# EAGLE board Main LF (EAGLE 7.5.0)
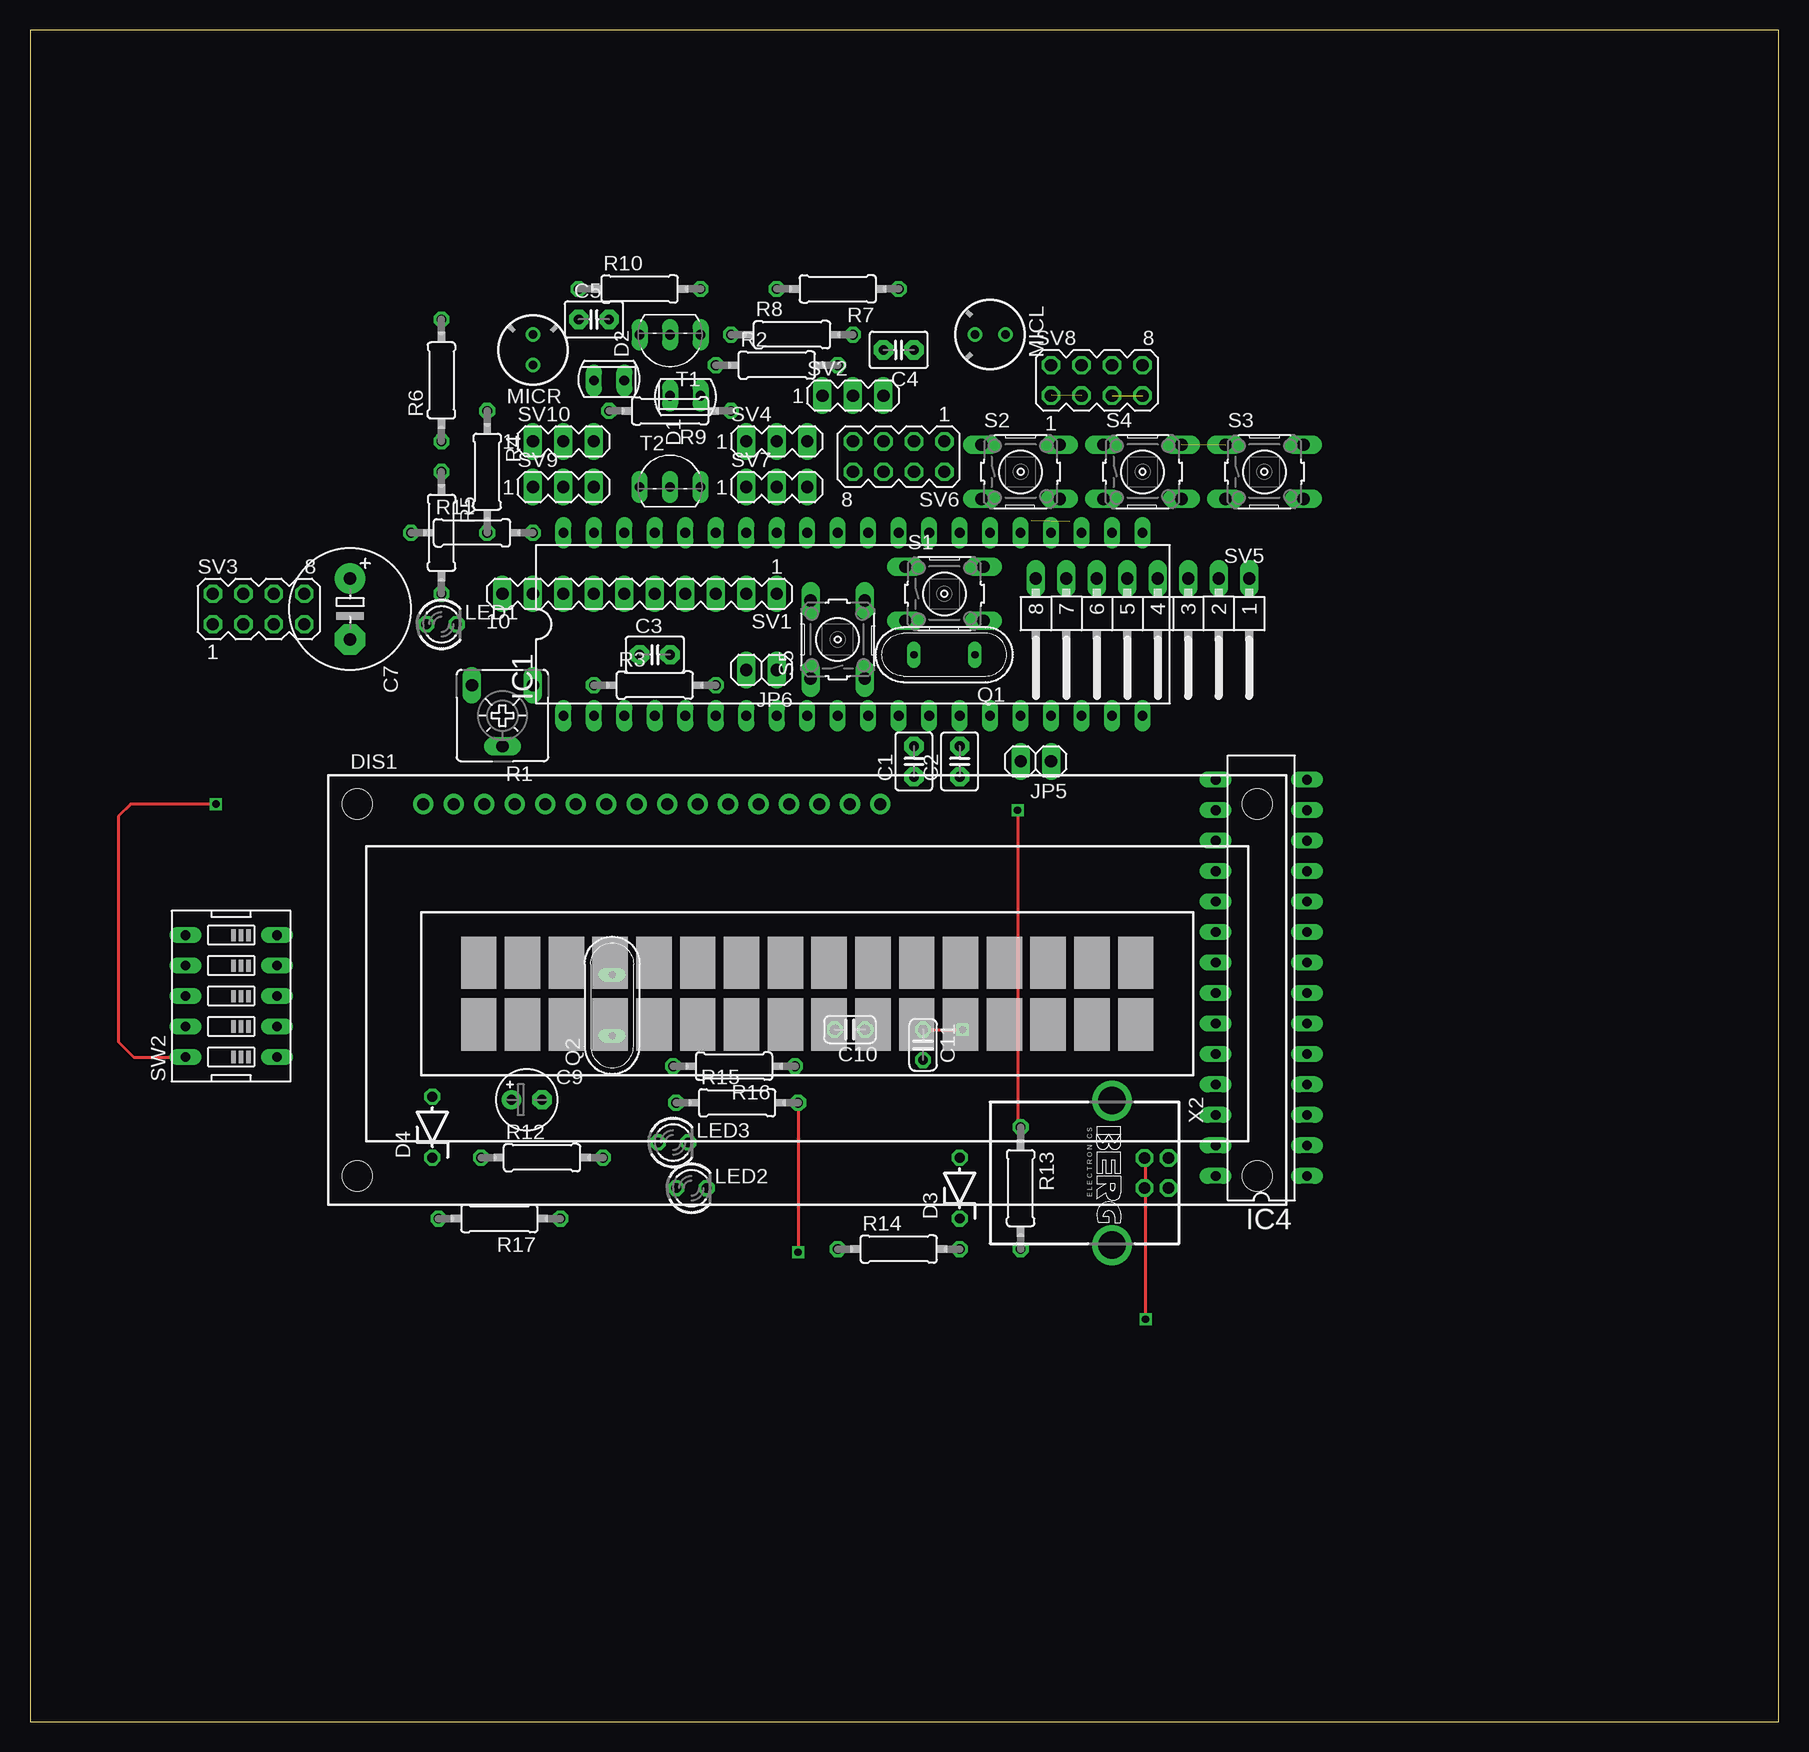
[diagram p0: board, top side]
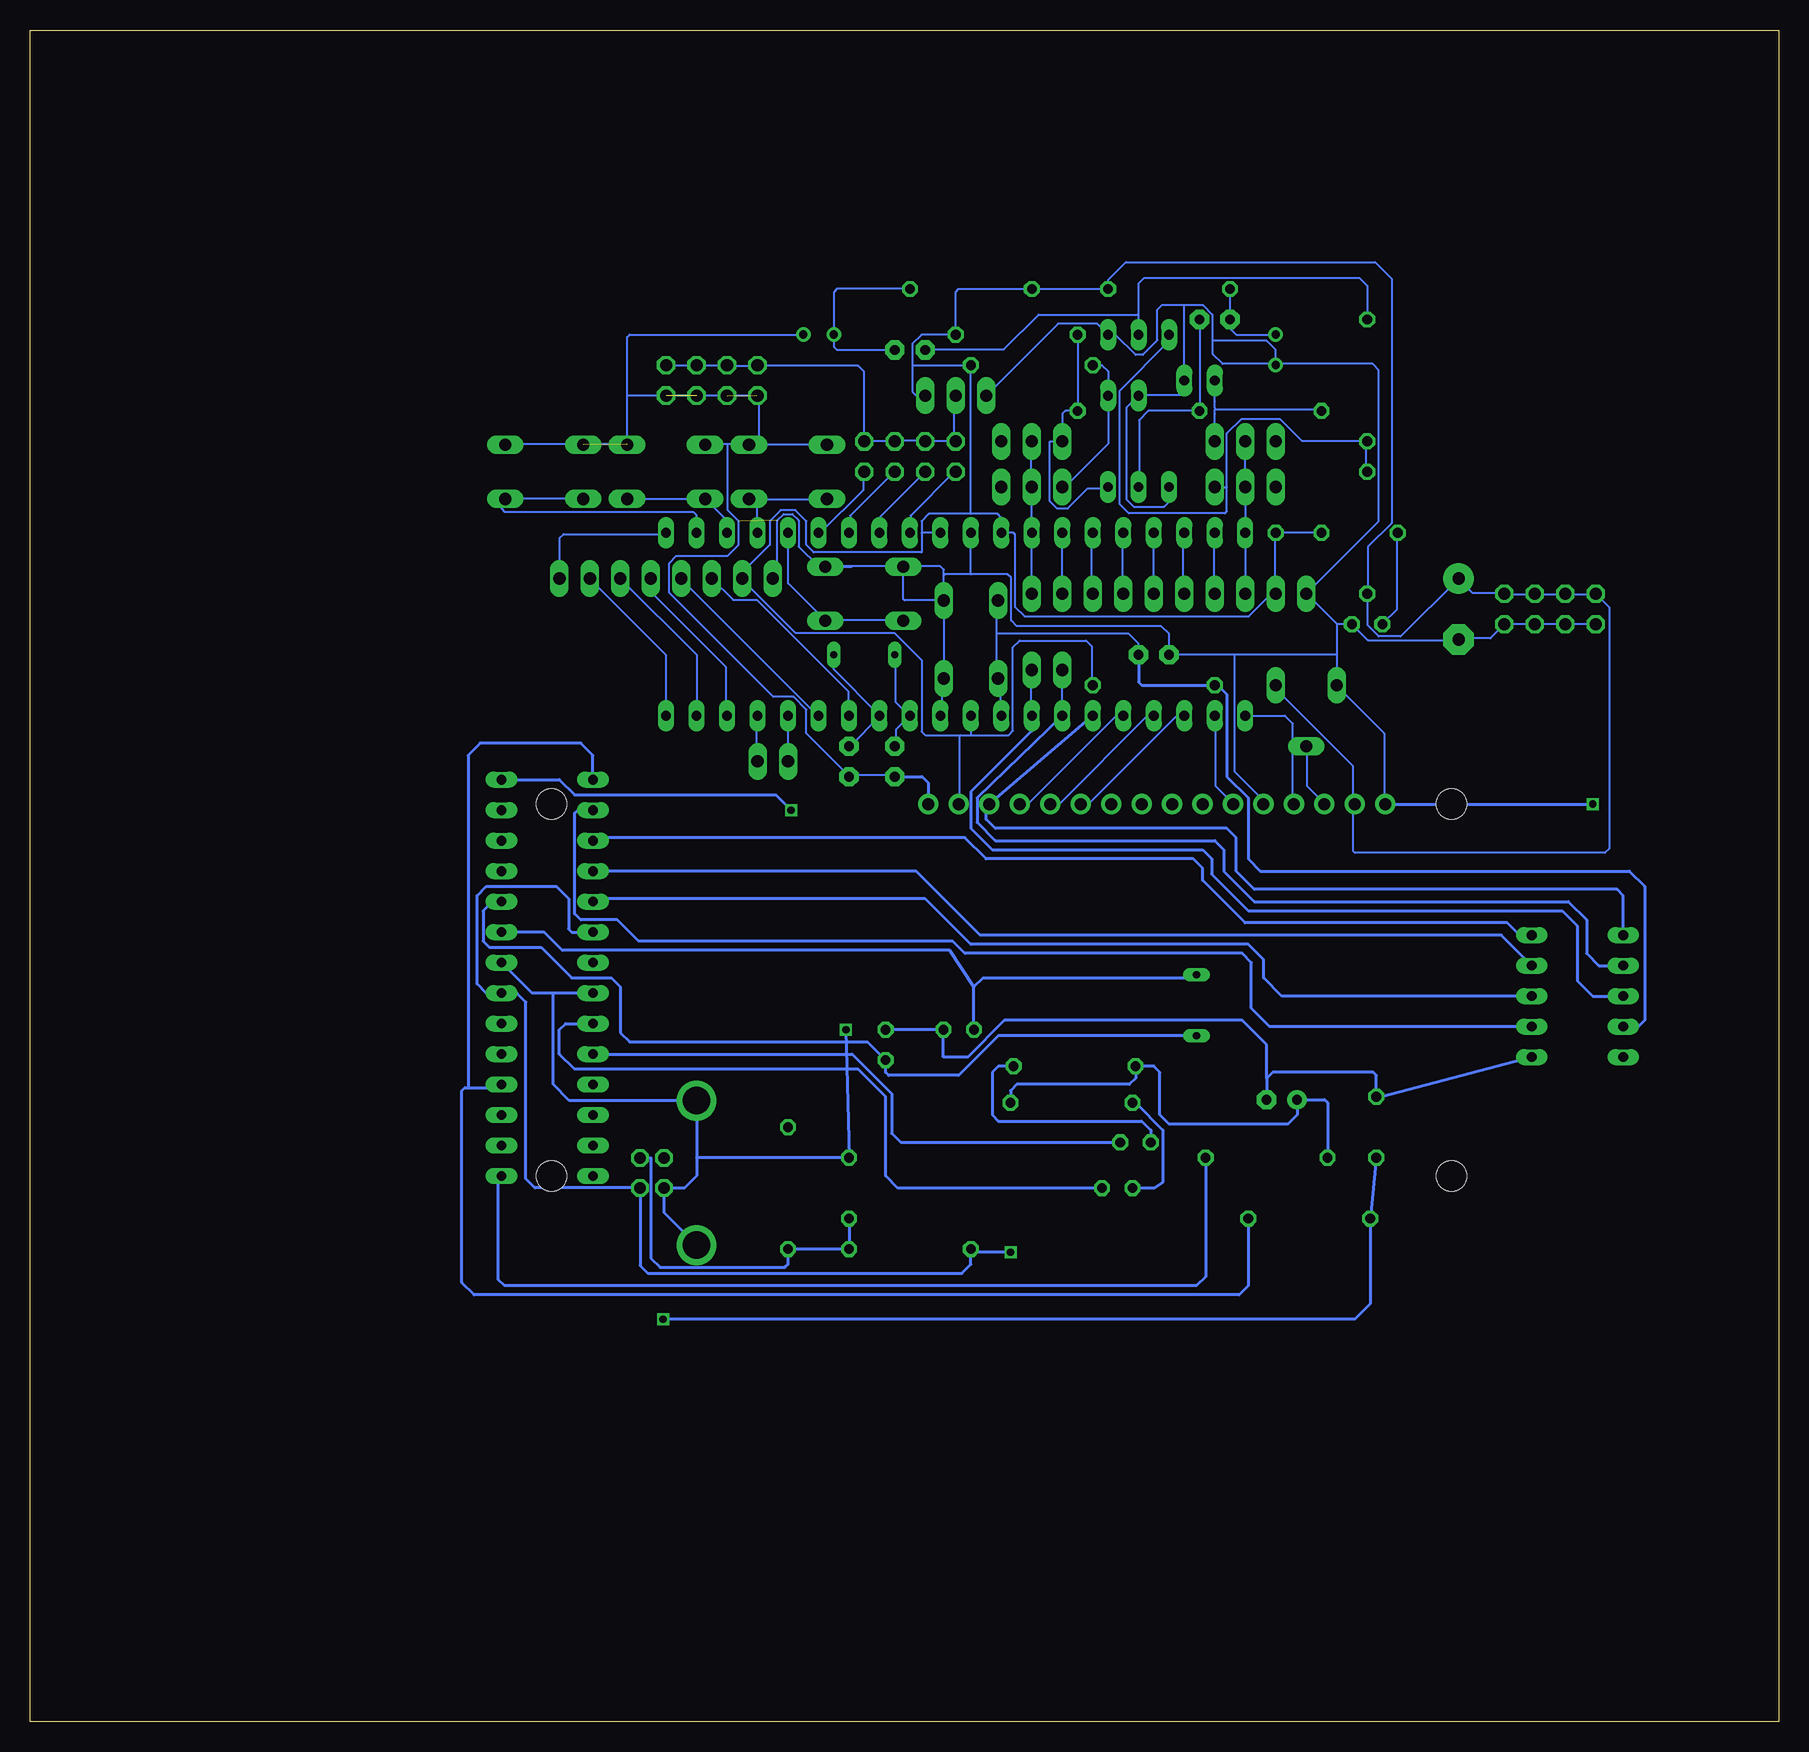
[diagram p1: board, bottom side, seen from below]

Size 145.72 x 140.96 mm. Coordinates in mm from the lower left corner, seen from the top.
Outline: 0,0 145.72,0 145.72,140.96 0,140.96 0,0
Copper layers (1*16): Top 0.035mm / dielectric 1.5mm / Bottom 0.035mm
Design rules "default": minimum track width 6mil, minimum drill 0.35mm, track to track 6mil, track to pad 6mil, pad to pad 6mil, via to via 6mil, smd to smd 6mil, copper to edge 40mil, drill to drill 6mil, minimum pad ring 10mil, minimum via ring 8mil, stop-mask expansion 4mil, vias tented up to drill 0mil, thermal gap 10mil

## Footprints (pad centres in the part's own frame; a part is rotated, then mirrored left to right if it is on the bottom)
C2.5-3 = drill 0.813 pad 1.6 octagon: 1 -1.27,0; 2 1.27,0
E5-10,5 = drill 1.016 pad 2.54: + -2.54,0 | drill 1.016 pad 2.54 octagon: - 2.54,0
E2,5-5 = drill 0.813 pad 1.6: + -1.27,0 | drill 0.813 pad 1.6 octagon: - 1.27,0
C025-024X044 = drill 0.813 octagon: 1 -1.27,0; 2 1.27,0
SFH225 = drill 0.813 long: A 0,1.27; K 0,-1.27
ZDIO-5 = drill 0.813 octagon: A 2.54,0; C -2.54,0
TUXGR_16X2_R2 = drill 1 pad 1.676: 1 -32,15.5; 2 -29.46,15.5; 3 -26.92,15.5; 4 -24.38,15.5; 5 -21.84,15.5; 6 -19.3,15.5; 7 -16.76,15.5; 8 -14.22,15.5; 9 -11.68,15.5; 10 -9.14,15.5; 11 -6.6,15.5; 12 -4.06,15.5; 13 -1.52,15.5; 14 1.02,15.5; 15 3.56,15.5; 16 6.1,15.5 | hole 2.5: -37.5,-15.5; 37.5,-15.5; -37.5,15.5; 37.5,15.5
DIL40 = drill 0.813 long: 1 -24.13,-7.62; 2 -21.59,-7.62; 3 -19.05,-7.62; 4 -16.51,-7.62; 5 -13.97,-7.62; 6 -11.43,-7.62; 7 -8.89,-7.62; 8 -6.35,-7.62; 9 -3.81,-7.62; 10 -1.27,-7.62; 11 1.27,-7.62; 12 3.81,-7.62; 13 6.35,-7.62; 14 8.89,-7.62; 15 11.43,-7.62; 16 13.97,-7.62; 17 16.51,-7.62; 18 19.05,-7.62; 19 21.59,-7.62; 20 24.13,-7.62; 21 24.13,7.62; 22 21.59,7.62; 23 19.05,7.62; 24 16.51,7.62; 25 13.97,7.62; 26 11.43,7.62; 27 8.89,7.62; 28 6.35,7.62; 29 3.81,7.62; 30 1.27,7.62; 31 -1.27,7.62; 32 -3.81,7.62; 33 -6.35,7.62; 34 -8.89,7.62; 35 -11.43,7.62; 36 -13.97,7.62; 37 -16.51,7.62; 38 -19.05,7.62; 39 -21.59,7.62; 40 -24.13,7.62
DIL28-3 = drill 0.813 long: 1 -16.51,-3.81; 2 -13.97,-3.81; 3 -11.43,-3.81; 4 -8.89,-3.81; 5 -6.35,-3.81; 6 -3.81,-3.81; 7 -1.27,-3.81; 8 1.27,-3.81; 9 3.81,-3.81; 10 6.35,-3.81; 11 8.89,-3.81; 12 11.43,-3.81; 13 13.97,-3.81; 14 16.51,-3.81; 15 16.51,3.81; 16 13.97,3.81; 17 11.43,3.81; 18 8.89,3.81; 19 6.35,3.81; 20 3.81,3.81; 21 1.27,3.81; 22 -1.27,3.81; 23 -3.81,3.81; 24 -6.35,3.81; 25 -8.89,3.81; 26 -11.43,3.81; 27 -13.97,3.81; 28 -16.51,3.81
1X02 = drill 1.016 long: 1 -1.27,0; 2 1.27,0
LED3MM = drill 0.813 octagon: A -1.27,0; K 1.27,0
F6050AP = drill 0.7 pad 1.2: 1 0,1.27; 2 0,-1.27
QS = drill 0.61 long: 1 -2.54,0; 2 2.54,0
CA6V = drill 1.016 long: A -2.54,-2.54; E 2.54,-2.54; S 0,2.54
0207/10 = drill 0.813 octagon: 1 -5.08,0; 2 5.08,0
B3F-10XX = drill 1.016 long: 1 -3.251,2.261; 2 3.251,2.261; 3 -3.251,-2.261; 4 3.251,-2.261
MA10-1 = drill 1.016 long: 1 -11.43,0; 2 -8.89,0; 3 -6.35,0; 4 -3.81,0; 5 -1.27,0; 6 1.27,0; 7 3.81,0; 8 6.35,0; 9 8.89,0; 10 11.43,0
MA03-1 = drill 1.016 long: 1 -2.54,0; 2 0,0; 3 2.54,0
MA04-2 = drill 1.016 octagon: 1 -3.81,-1.27; 2 -3.81,1.27; 3 -1.27,-1.27; 4 -1.27,1.27; 5 1.27,-1.27; 6 1.27,1.27; 7 3.81,-1.27; 8 3.81,1.27
MA08-1W = drill 1.016 long: 1 -8.89,0; 2 -6.35,0; 3 -3.81,0; 4 -1.27,0; 5 1.27,0; 6 3.81,0; 7 6.35,0; 8 8.89,0
EDG-05 = drill 0.813 long: 1 -5.08,-3.81; 2 -2.54,-3.81; 3 0,-3.81; 4 2.54,-3.81; 5 5.08,-3.81; 6 5.08,3.81; 7 2.54,3.81; 8 0,3.81; 9 -2.54,3.81; 10 -5.08,3.81
TO92-EBC = drill 0.813 long: B 0,-1.27; C 2.54,-1.27; E -2.54,-1.27
PN61729-S = drill 0.95 octagon: 1 1.25,4.71; 2 -1.25,4.71; 3 -1.25,2.71; 4 1.25,2.71 | drill 2.3 pad 2.9: S1 -6.02,0; S2 6.02,0

## Placement (x,y rotation side)
C1  22p  [C2.5-3]  73.66,80.01 90 top
C2  22p  [C2.5-3]  77.47,80.01 90 top
C3  10nF  [C2.5-3]  52.07,88.9 0 top
C4  100nF  [C2.5-3]  72.39,114.3 180 top
C5  100nF  [C2.5-3]  46.99,116.84 0 top
C7  1000uF/16V  [E5-10,5]  26.67,92.71 270 top
C9  10uF/16V  [E2,5-5]  41.4,51.82 0 top
C10  22pF  [C025-024X044]  68.33,57.66 180 top
C11  22pF  [C025-024X044]  74.42,56.39 270 top
D1  SFH225  [SFH225]  54.61,110.49 270 top
D2  SFH225  [SFH225]  48.26,111.76 90 top
D3  DZ3,6V  [ZDIO-5]  77.47,44.45 90 top
D4  DZ3,6V  [ZDIO-5]  33.53,49.53 90 top
DIS1  TUXGR_16X2_R2  [TUXGR_16X2_R2]  64.77,60.96 0 top
IC1  MEGA16-P  [DIL40]  68.58,91.44 0 top
IC4  MEGA8-P  [DIL28-3]  102.62,61.98 90 top
JP5  [1X02]  83.82,80.01 180 top
JP6  [1X02]  60.96,87.63 180 top
LED1  merah  [LED3MM]  34.29,91.44 0 top
LED2  Merah  [LED3MM]  55.12,44.45 0 top
LED3  hijau  [LED3MM]  53.59,48.26 0 top
MICL  MC  [F6050AP]  80.01,115.57 270 top
MICR  MC  [F6050AP]  41.91,114.3 180 top
Q1  8MHz  [QS]  76.2,88.9 180 top
Q2  12MHz  [QS]  48.51,59.69 90 top
R1  20K  [CA6V]  39.37,83.82 180 top
R2  56K  [0207/10]  62.23,113.03 0 top
R3  10K  [0207/10]  52.07,86.36 0 top
R4  56K  [0207/10]  38.1,104.14 270 top
R5  10K  [0207/10]  34.29,99.06 270 top
R6  100K  [0207/10]  34.29,111.76 90 top
R7  10K  [0207/10]  67.31,119.38 180 top
R8  10K  [0207/10]  63.5,115.57 0 top
R9  100K  [0207/10]  53.34,109.22 180 top
R10  10K  [0207/10]  50.8,119.38 0 top
R11  330  [0207/10]  36.83,99.06 0 top
R12  10K  [0207/10]  42.67,46.99 0 top
R13  68  [0207/10]  82.55,44.45 270 top
R14  2K2  [0207/10]  72.39,39.37 0 top
R15  330  [0207/10]  58.93,51.56 0 top
R16  330  [0207/10]  58.67,54.61 180 top
R17  68  [0207/10]  39.12,41.91 180 top
S1  [B3F-10XX]  76.2,93.98 0 top
S2  [B3F-10XX]  82.55,104.14 0 top
S3  [B3F-10XX]  102.87,104.14 0 top
S4  [B3F-10XX]  92.71,104.14 0 top
S5  [B3F-10XX]  67.31,90.17 90 top
SV1  [MA10-1]  50.8,93.98 180 top
SV2  [MA03-1]  68.58,110.49 0 top
SV3  [MA04-2]  19.05,92.71 0 top
SV4  [MA03-1]  62.23,106.68 0 top
SV5  [MA08-1W]  92.71,95.25 180 top
SV6  [MA04-2]  72.39,105.41 180 top
SV7  [MA03-1]  62.23,102.87 0 top
SV8  [MA04-2]  88.9,111.76 0 top
SV9  [MA03-1]  44.45,102.87 0 top
SV10  [MA03-1]  44.45,106.68 0 top
SW2  [EDG-05]  16.76,60.45 90 top
T1  [TO92-EBC]  53.34,114.3 180 top
T2  [TO92-EBC]  53.34,104.14 0 top
X2  PN61729-S  [PN61729-S]  90.17,45.72 270 top

## Library data of the parts
C1-C5 = capacitor-wima
C7 C9-C11 R2-R11 = rcl
D1 D2 = opto-trans-siemens; OC_FARNELL: unknown; OC_NEWARK: unknown
D3 D4 = diode
DIS1 = display-lcd; OC_FARNELL: unknown; OC_NEWARK: unknown
IC1 = atmel; MPN: ATMEGA16-16PU; OC_FARNELL: 9171142; OC_NEWARK: 01M6885
IC4 = atmel
JP5 JP6 = pinhead
LED1-LED3 = led
MICL MICR = microphon
Q1 Q2 SW2 = special
R1 = pot
R12-R17 = resistor
S1-S5 = switch-omron; MPN: B3F-1000; OC_FARNELL: 176432; OC_NEWARK: 36M3542
SV1-SV10 = con-lstb; OC_FARNELL: unknown; OC_NEWARK: unknown
T1 T2 = transistor
X2 = con-berg

## Nets
DGND: C9.- C10.1 C11.1 D3.A D4.A IC4.8 IC4.22 SW2.1 X2.4 X2.S1 X2.S2
GND: C1.1 C2.1 C3.1 C7.- D1.K D2.K DIS1.1 DIS1.5 DIS1.16 IC1.11 IC1.31 LED1.K MICL.1 MICR.1 R1.E S1.1 S1.2 S2.1 S2.2 S3.1 S3.2 S4.1 S4.2 S5.3 S5.4 SV1.10 SV2.1 SV3.1 SV3.3 SV3.5 SV3.7 SV5.8 SV8.1 SV8.3 SV8.5 SV8.7 SW2.10 T1.E T2.E
MISO: IC1.7 JP6.2 SW2.7
MOSI: DIS1.14 IC1.6 SW2.6
N$1: IC1.33 SV1.1 SV4.2 SV7.2
N$2: IC1.34 SV1.2
N$3: IC1.35 SV1.3
N$4: IC1.36 SV1.4
N$5: IC1.37 SV1.5
N$6: IC1.38 SV1.6
N$7: IC1.39 SV1.7
N$8: D2.A R4.1 SV10.3
N$9: IC1.24 S2.3 S2.4
N$10: DIS1.13 IC1.5
N$11: DIS1.12 IC1.4
N$12: DIS1.11 IC1.3
N$13: DIS1.6 IC1.2
N$14: R5.1 R6.1 SV9.3 T1.C
N$15: DIS1.3 R1.S
N$16: C1.2 IC1.12 Q1.2
N$17: C2.2 IC1.13 Q1.1
N$18: DIS1.4 IC1.1
N$19: D1.A R2.1 SV7.1
N$20: IC1.23 S4.3 S4.4
N$21: IC1.40 SV1.8 SV9.2 SV10.2
N$22: C4.2 R6.2 T1.B
N$23: C4.1 MICL.2 R7.1
N$24: R8.1 R9.1 SV4.1 T2.C
N$25: C5.2 R9.2 T2.B
N$26: C5.1 MICR.2 R10.1
N$27: IC1.22 S3.3 S3.4
N$28: IC1.25 S1.3 S1.4
N$30: IC1.21 SV5.1
N$32: IC1.20 SV5.2
N$33: IC1.19 SV5.3
N$34: IC1.18 SV5.4
N$35: IC1.15 SV5.5
N$36: IC1.14 SV5.6
N$37: IC1.16 JP5.2
N$38: IC1.17 JP5.1
N$41: LED1.A R11.1
N$42: IC4.1 R12.2
N$44: IC1.26 SV6.2
N$45: IC1.27 SV6.4
N$46: IC1.28 SV6.6
N$47: IC1.29 SV6.8
N$51: C10.2 IC4.9 Q2.2
N$52: C11.2 IC4.10 Q2.1
N$53: IC4.14 R13.1
N$55: LED2.A R15.1
N$56: LED3.A R16.1
N$57: IC4.23 LED2.K
N$58: IC4.24 LED3.K
N$59: D4.C R17.2 X2.3
N$67: IC4.4 IC4.15 R17.1
N$69: D3.C R13.2 R14.2 X2.2
N$175: IC4.17 SW2.5
N$176: IC4.18 SW2.4
N$177: IC4.19 SW2.3
N$178: IC4.16 SW2.2
RESET: C3.2 IC1.9 R3.1 S5.1 S5.2 SW2.9
SCK: IC1.8 JP6.1 SW2.8
VCC: C7.+ DIS1.2 DIS1.15 IC1.10 IC1.30 IC1.32 R1.A R2.2 R3.2 R4.2 R5.2 R7.2 R8.2 R10.2 R11.2 SV1.9 SV2.3 SV3.2 SV3.4 SV3.6 SV3.8 SV5.7
VDD: SV2.2 SV6.1 SV6.3 SV6.5 SV6.7 SV8.2 SV8.4 SV8.6 SV8.8
VPP: C9.+ IC4.7 IC4.20 R12.1 R14.1 R15.2 R16.2 X2.1

## Tracks (layer width: path | path; a pad name or v marks a point on that pad's centre or on a via)
DGND  (via drill 0.6)
  Top 0.254: C11.1 v77.72,57.66
  Bottom 0.254: X2.S2 92.88,42.41 X2.4 92.86,44.45 91.19,44.45 90.17,45.47 90.17,46.99 | SW2.1 33.02,52.07 D4.A 33.53,53.85 33.78,54.1 42.16,54.1 42.67,53.59 | 90.17,46.99 X2.S1 100.76,51.74 102.11,53.09 102.11,60.71 | 42.67,53.59 C9.- | IC4.22 102.11,60.71 | 102.11,60.71 103.89,60.71 IC4.8 | 90.17,46.99 D3.A v77.72,57.66 | C11.1 C10.1 69.6,55.37 67.56,55.37 64.52,58.42 44.7,58.42 42.67,56.39 42.67,53.59
GND  (via drill 0.6)  (5 unrouted)
  Top 0.254: v15.49,76.45 8.38,76.45 7.37,75.44 7.37,56.64 8.64,55.37 SW2.10
  Bottom 0.152: T2.E 50.8,101.65 51.21,101.24 53.75,101.24 54.36,101.85 54.36,109.47 D1.K 53.29,110.54 49.83,110.54 49.53,110.85 D2.K 49.53,118.01 | 47.19,115.06 47.19,117.25 47.95,118.01 49.53,118.01 | 47.19,115.06 47.19,114 46.33,113.13 33.83,113.13 33.33,112.62 33.33,100.03 SV1.10 39.27,93.93 36.83,91.49 | 49.53,118.01 51.41,118.01 51.77,117.65 51.77,115.11 52.98,113.89 53.59,113.89 55.27,115.57 T1.E 56.79,116.48 60.05,116.48 SV2.1 | 69.6,86.92 69.75,86.77 69.75,83.87 IC1.11 | 67.31,95.61 IC1.31 | 69.6,86.92 S5.3 | 17.78,91.49 15.34,91.49 SV3.1 | 17.78,91.49 20.22,91.49 SV3.5 20.37,91.49 22.81,91.49 SV3.7 24.03,90.27 26.62,90.27 C7.- 26.77,90.12 34.24,90.12 LED1.K 35.61,91.49 36.83,91.49 | 17.78,91.49 SV3.3 | 36.83,91.49 36.83,88.9 | 36.83,88.9 R1.E 36.83,86.31 32.87,82.35 32.87,76.56 DIS1.1 | 36.83,88.9 45.36,88.9 | 45.36,88.9 C3.1 50.8,90.63 51.46,91.29 63.47,91.29 63.96,91.77 63.96,95.3 64.26,95.61 67.31,95.61 | 45.36,88.9 45.36,79.2 43.08,76.91 43.08,76.56 DIS1.5 | 95.99,106.43 106.02,106.43 S3.2 | 84.99,106.43 85.75,106.43 S2.2 | 84.99,106.43 79.35,106.43 S2.1 | 87.58,106.43 85.9,106.43 S2.2 | 87.58,106.43 89.41,106.43 S4.1 | 85.14,110.54 SV8.1 | 84.99,106.43 84.99,110.39 SV8.1 | 84.99,106.43 S2.2 | C1.1 73.71,78.84 77.37,78.84 C2.1 77.52,78.84 81.03,82.35 81.03,84.33 82.09,85.39 83.77,85.39 92.46,94.08 92.46,96.52 91.85,97.13 87.58,97.13 86.66,98.04 86.66,100.03 87.58,100.94 87.58,106.43 | MICL.1 95.76,115.57 95.96,115.37 95.96,110.49 | S4.2 95.96,110.49 | 95.96,110.49 SV8.7 SV8.1 | MICR.1 41.91,114.3 42.67,115.06 47.19,115.06 | 72.97,96.27 S1.1 72.95,93.52 72.85,93.42 S5.4
  Bottom 0.152: 77.22,96.27 69.85,96.27 69.57,95.99 69.57,95.5 | 77.22,96.27 80.01,96.27 81.66,97.92 81.66,100.09 82.18,100.61 82.92,100.61 83.44,100.09 83.44,95.63 SV5.8 | S5.4 69.57,86.94 69.6,86.92 | S5.4 69.57,95.5 | 67.31,95.61 69.47,95.61 69.57,95.5 | S1.2 77.24,96.24 77.22,96.27
  Bottom 0.254: C1.1 71.37,78.74 70.87,78.23 DIS1.16 | DIS1.1 v15.5,76.46 v15.49,76.45
MISO
  Bottom 0.152: IC1.7 JP6.2
  Bottom 0.254: IC1.7 66.8,76.96 66.8,74.93 65.28,73.41 46.99,73.41 46.23,72.64 46.23,70.87 43.69,68.33 17.53,68.33 16,66.8 16,64.01 14.99,62.99 SW2.7
MOSI
  Bottom 0.254: IC1.6 DIS1.14 66.04,76.21 66.04,75.18 65.28,74.42 45.97,74.42 45.21,73.66 45.21,70.87 43.69,69.34 13.46,69.34 12.95,68.83 SW2.6
N$1
  Bottom 0.152: SV1.1 62.28,94.08 62.28,98.96 IC1.33 62.28,99.11 62.28,102.77 SV7.2 62.28,102.92 62.28,106.58 SV4.2
N$2
  Bottom 0.152: SV1.2 IC1.34
N$3
  Bottom 0.152: IC1.35 57.25,98.96 57.25,94.08 SV1.3
N$4
  Bottom 0.152: IC1.36 54.66,98.96 54.66,94.08 SV1.4
N$5
  Bottom 0.152: SV1.5 IC1.37
N$6
  Bottom 0.152: IC1.38 49.63,98.96 49.63,94.08 SV1.6
N$7
  Bottom 0.152: IC1.39 47.04,98.96 47.04,94.08 SV1.7
N$8
  Bottom 0.152: R4.1 38.2,109.32 46.99,109.32 | 46.89,111.76 D2.A 46.99,109.98 46.99,109.47 46.99,109.32 | SV10.3 46.99,108.97 46.99,109.32
N$9
  Bottom 0.152: 85.14,101.24 85.14,99.11 IC1.24 | 85.14,101.24 85.75,101.85 S2.4 85.14,101.24 | 85.14,101.24 84.53,101.85 79.35,101.85 S2.3
N$10
  Bottom 0.152: IC1.5 54.66,83.72 55.27,83.72 62.43,76.56 63.19,76.56 DIS1.13
N$11
  Bottom 0.152: IC1.4 52.07,83.72 52.68,83.72 59.84,76.56 60.6,76.56 DIS1.12
N$12
  Bottom 0.152: IC1.3 49.63,83.72 50.24,83.72 57.4,76.56 58.17,76.56 DIS1.11
N$13
  Bottom 0.152: IC1.2 46.89,83.72 46.89,77.93 45.52,76.56 DIS1.6
N$14
  Bottom 0.152: R5.1 34.39,104.14 34.39,106.58 R6.1 34.39,106.73 39.73,106.73 41.55,108.56 44.75,108.56 45.97,107.34 45.97,102.87 | T1.C 50.85,115.57 50.85,114.96 54.92,110.9 54.92,101.45 54.15,100.69 46.13,100.69 45.97,100.84 45.97,102.87 | SV9.3 45.97,102.87
N$15
  Bottom 0.152: R1.S 39.27,81.28 39.27,77.93 37.9,76.56 DIS1.3
N$16
  Bottom 0.152: Q1.2 73.56,88.9 73.56,84.94 72.49,83.87 IC1.12 73.56,82.65 73.56,81.28 C1.2
N$17
  Bottom 0.152: Q1.1 78.74,87.68 74.93,83.87 IC1.13 74.93,83.72 77.37,81.28 C2.2
N$18
  Bottom 0.152: IC1.1 41.15,83.82 40.49,83.16 40.49,76.56 DIS1.4
N$19
  Bottom 0.152: R2.1 56.39,113.03 55.88,112.52 D1.A 55.88,106.48 59.49,102.87 SV7.1
N$20
  Bottom 0.152: IC1.23 87.73,99.11 87.73,100.18 89.41,101.85 S4.3 89.56,101.85 95.96,101.85 S4.4
N$21
  Bottom 0.152: SV1.8 IC1.40 SV9.2 SV10.2
N$22
  Bottom 0.152: C4.2 71.12,114.35 64.57,114.35 61.67,117.25 53.44,117.25 53.34,117.35 | T1.B 53.34,117.35 | 53.34,117.35 53.34,119.84 52.88,120.29 34.95,120.29 34.29,119.63 R6.2
N$23
  Bottom 0.152: R7.1 78.49,119.38 78.74,119.13 MICL.2 78.74,114.55 78.49,114.3 C4.1
N$24
  Bottom 0.152: T2.C 55.88,102.77 57.56,102.77 59.23,101.09 60.15,101.09 60.76,101.7 60.76,106.63 60.71,106.68 SV4.1 59.69,108.97 59.44,109.22 R9.1 R8.1
N$25
  Bottom 0.152: C5.2 R9.2 52.53,109.22 53.29,108.46 53.29,102.92 T2.B
N$26
  Bottom 0.152: MICR.2 45.21,115.57 45.72,116.08 C5.1 R10.1
N$27
  Bottom 0.152: IC1.22 90.17,100.53 90.42,100.79 106.12,100.79 106.43,101.09 106.43,101.57 S3.4 S3.3
N$28
  Bottom 0.152: IC1.25 82.55,94.84 79.5,91.8 S1.4 79.35,91.8 72.95,91.8 S1.3
N$30
  Bottom 0.152: IC1.21 92.76,98.96 101.24,98.96 101.6,98.6 SV5.1
N$32
  Bottom 0.152: IC1.20 92.76,83.87 92.76,88.9 99.01,95.15 SV5.2
N$33
  Bottom 0.152: IC1.19 90.17,88.9 SV5.3
N$34
  Bottom 0.152: IC1.18 87.73,83.87 87.73,87.88 93.98,94.13 SV5.4
N$35
  Bottom 0.152: IC1.15 80.11,83.87 91.39,95.15 SV5.5
N$36
  Bottom 0.152: SV5.6 87.12,93.47 85.14,93.47 77.52,85.85 77.52,83.87 IC1.14
N$37
  Bottom 0.152: JP5.2 IC1.16
N$38
  Bottom 0.152: IC1.17 85.14,83.72 85.14,80.06 JP5.1
N$41
  Bottom 0.152: R11.1 31.8,98.96 31.8,92.71 33.02,91.49 LED1.A
N$42
  Bottom 0.254: R12.2 47.75,37.08 48.51,36.32 106.17,36.32 106.68,36.83 106.68,45.21 IC4.1
N$44
  Bottom 0.152: SV6.2 76.3,104.14 76.3,102.62 79.86,99.06 IC1.26
N$45
  Bottom 0.152: IC1.27 77.37,99.11 77.37,100.48 73.71,104.14 SV6.4
N$46
  Bottom 0.152: IC1.28 74.93,100.33 SV6.6
N$47
  Bottom 0.152: IC1.29 72.34,99.11 72.34,100.48 68.68,104.14 SV6.8
N$51
  Bottom 0.254: C10.2 67.06,61.21 | 67.06,61.21 66.29,61.98 48.77,61.98 Q2.2 | 67.06,61.21 69.09,64.26 101.35,64.26 102.87,65.79 IC4.9
N$52
  Bottom 0.254: Q2.1 65.02,57.15 68.33,53.85 74.17,53.85 74.42,54.1 C11.2 75.95,56.64 95.76,56.64 96.52,57.4 96.52,61.21 97.28,61.98 100.58,61.98 103.12,64.52 107.44,64.52 107.95,65.02 107.95,67.56 107.19,68.33 IC4.10
N$53  (via drill 0.6)
  Top 0.254: v82.3,75.95 82.3,49.78 R13.1
  Bottom 0.254: IC4.14 101.6,78.49 100.33,77.22 83.57,77.22 v82.3,75.95
N$55
  Bottom 0.254: R15.1 53.59,51.56 51.31,49.28 51.31,44.96 52.07,44.45 LED2.A
N$56
  Bottom 0.254: R16.1 65.02,54.61 65.53,54.1 65.53,50.55 65.02,50.04 53.09,50.04 52.32,49.28 LED3.A
N$57
  Bottom 0.254: LED2.K 73.41,44.45 74.42,45.47 74.42,52.07 76.71,54.36 100.33,54.36 101.6,55.63 101.6,57.66 101.09,58.17 IC4.23
N$58
  Bottom 0.254: IC4.24 77.22,55.63 73.91,52.32 73.91,49.02 73.15,48.26 LED3.K
N$59  (via drill 0.6)
  Top 0.254: v92.96,33.53 92.96,46.89 X2.3
  Bottom 0.254: D4.C R17.2 34.04,34.8 35.31,33.53 v92.96,33.53 | X2.3 93.2,46.97 93.22,46.99
N$67
  Bottom 0.254: R17.1 44.2,36.32 44.96,35.56 108.71,35.56 109.73,36.58 109.73,52.58 109.47,52.83 109.22,52.83 | 109.22,52.83 106.68,52.83 IC4.4 | IC4.15 98.81,80.52 99.82,81.53 108.2,81.53 109.22,80.52 109.22,52.83
N$69
  Bottom 0.254: D3.C R14.2 R13.2 82.55,38.1 82.8,37.85 93.22,37.85 93.98,38.61 93.98,46.97 X2.2
N$175
  Bottom 0.254: SW2.5 21.59,65.53 22.61,66.55 44.45,66.55 48.01,70.1 48.01,71.12 48.77,71.88 66.04,71.88 67.82,73.66 98.55,73.66 IC4.17
N$176
  Bottom 0.254: SW2.4 23.11,65.53 66.55,65.53 71.88,70.87 IC4.18
N$177
  Bottom 0.254: SW2.3 41.4,60.45 42.93,61.98 42.93,63.5 44.2,64.77 67.31,64.77 71.12,68.58 98.55,68.58 IC4.19
N$178
  Bottom 0.254: SW2.2 42.42,57.91 43.94,59.44 43.94,63.25 44.7,64.01 67.82,64.01 68.83,65.02 95,65.02 96.77,66.8 99.82,66.8 100.33,67.31 100.33,75.69 99.82,76.2 99.06,76.2 IC4.16
RESET
  Bottom 0.152: IC1.9 64.87,83.87 64.87,86.77 65.02,86.92 S5.1 65.18,86.92 65.18,90.63 | 65.18,90.63 65.18,93.32 S5.2 | 65.18,90.63 54.15,90.63 53.34,89.81 C3.2
  Bottom 0.254: C3.2 53.34,86.61 53.09,86.36 R3.1 46.74,86.36 45.97,85.6 45.97,78.74 44.2,76.96 44.2,71.88 43.18,70.87 12.45,70.87 11.18,69.6 11.18,58.42 11.68,57.91 SW2.9
SCK
  Bottom 0.152: JP6.1 62.28,87.53 62.28,83.87 IC1.8
  Bottom 0.254: IC1.8 62.23,82.55 67.31,77.47 67.31,74.42 65.53,72.64 48.01,72.64 47.24,71.88 47.24,70.61 44.2,67.56 18.03,67.56 16.76,66.29 16.76,61.72 15.49,60.45 SW2.8
VCC
  Bottom 0.152: 35.46,76.61 35.46,79.6 41.86,86 41.86,86.31 R1.A | 17.78,93.93 15.34,93.93 SV3.2 14.12,92.86 14.12,72.75 14.48,72.39 35.31,72.39 35.46,72.54 35.46,76.61 | 17.78,93.93 20.22,93.93 SV3.6 20.37,93.93 22.81,93.93 SV3.8 22.96,94.08 25.55,94.08 26.62,95.15 C7.+ 31.5,90.42 33.33,90.42 34.24,91.34 34.24,93.93 R5.2 34.24,94.08 34.24,97.89 32.26,99.87 32.26,120.24 33.63,121.62 54.41,121.62 55.88,120.14 R10.2 R7.2 | 17.78,93.93 SV3.4 | 62.28,119.38 R7.2 | R3.2 57.25,86.46 57.25,89.61 57.71,90.07 63.25,90.07 63.81,89.51 63.81,82.55 64.16,82.19 67.31,82.19 | DIS1.15 68.22,76.56 68.22,82.14 68.17,82.19 | R4.2 38.2,99.11 41.86,99.11 R11.2 42.01,98.96 42.01,94.08 SV1.9 42.01,93.93 42.32,93.93 44.14,92.1 62.84,92.1 63.65,92.91 63.65,98.96 63.75,99.06 IC1.32 64.77,100.33 65.08,100.63 67.31,100.63 | 67.31,100.63 67.31,112.98 | 67.31,112.98 R2.2 | 68.17,82.19 67.31,82.19 | IC1.10 67.31,82.19 | 68.17,82.19 71.12,82.19 71.42,82.5 71.42,88.44 73.71,90.73 81.94,90.73 86.36,95.15 SV5.7 86.36,95.76 84.07,98.04 84.07,100.03 83.16,100.94 81.94,100.94 81.03,100.03 81.03,98.04 80.42,97.43 71.42,97.43 71.42,99.06 | DIS1.2 35.46,76.61 | 71.42,99.06 71.42,100.03 70.81,100.63 67.31,100.63 | IC1.30 71.42,99.06 | R7.2 68.33,119.38 68.58,119.13 R8.2 71.42,115.57 72.19,114.81 72.19,113.03 | SV2.3 71.88,110.49 72.19,110.79 72.19,113.03 | 67.31,112.98 72.14,112.98 72.19,113.03
VDD
  Bottom 0.152: 90.17,112.98 87.73,112.98 SV8.4 87.58,112.98 85.14,112.98 SV8.2 84.99,112.98 76.71,112.98 76.2,112.47 SV6.1 76.15,106.73 73.71,106.73 SV6.3 73.56,106.73 71.12,106.73 | 90.17,112.98 92.61,112.98 SV8.8 | 90.17,112.98 SV8.6 | 71.12,106.73 68.68,106.73 | 68.68,106.73 68.68,110.39 SV2.2 | 68.68,106.73 SV6.7 | 71.12,106.73 SV6.5
VPP  (via drill 0.6)
  Top 0.254: R15.2 v64.01,39.12
  Bottom 0.254: R12.1 37.59,51.56 37.85,51.82 C9.+ 40.13,50.55 40.89,49.78 50.8,49.78 51.56,50.55 51.56,54.1 52.07,54.61 R16.2 53.59,53.59 54.1,53.09 63.5,53.09 64.01,52.58 R15.2 | IC4.20 100.58,65.79 100.84,66.04 100.84,68.58 101.85,69.6 107.7,69.6 108.46,68.83 108.46,61.47 107.7,60.71 IC4.7 105.16,60.71 104.39,59.94 104.39,45.21 103.65,44.47 X2.1 94.88,37.98 94.23,37.34 68.07,37.34 67.31,38.1 R14.1 67.06,39.12 v64.01,39.12